# Altium PCB PCB_ZCD-and-AC-Voltage-sensor_2025-10-18.pcbdoc
Units mm, origin at the board's own origin, x right, y up, seen from the top; angles counter-clockwise.
Board outline 125.65 x 110.9 mm, 2 copper layers (Top Layer, Bottom Layer); 88 components, 45 nets, 199 pads, 188 vias.
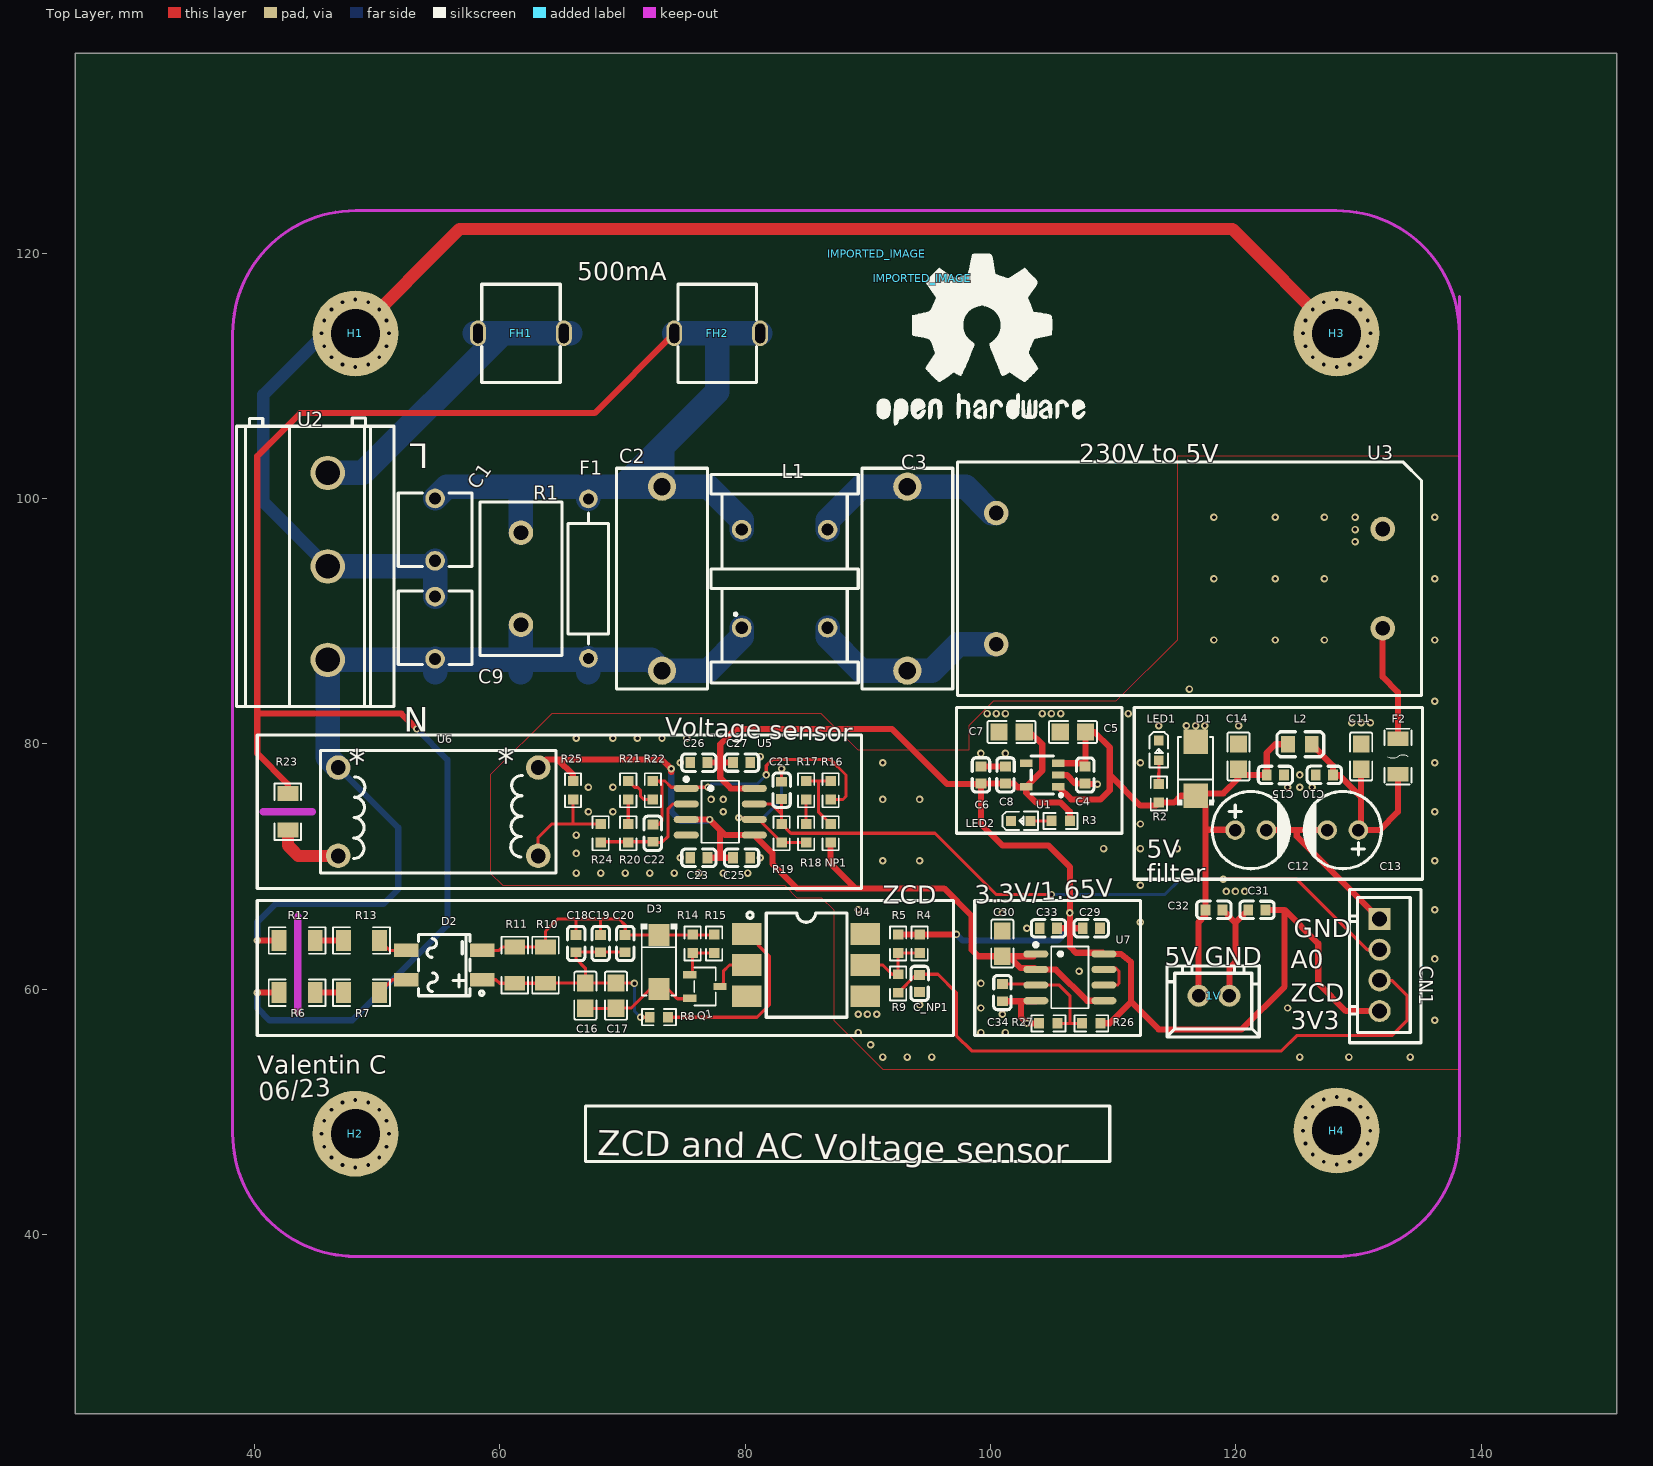
[diagram p0: Top Layer view]
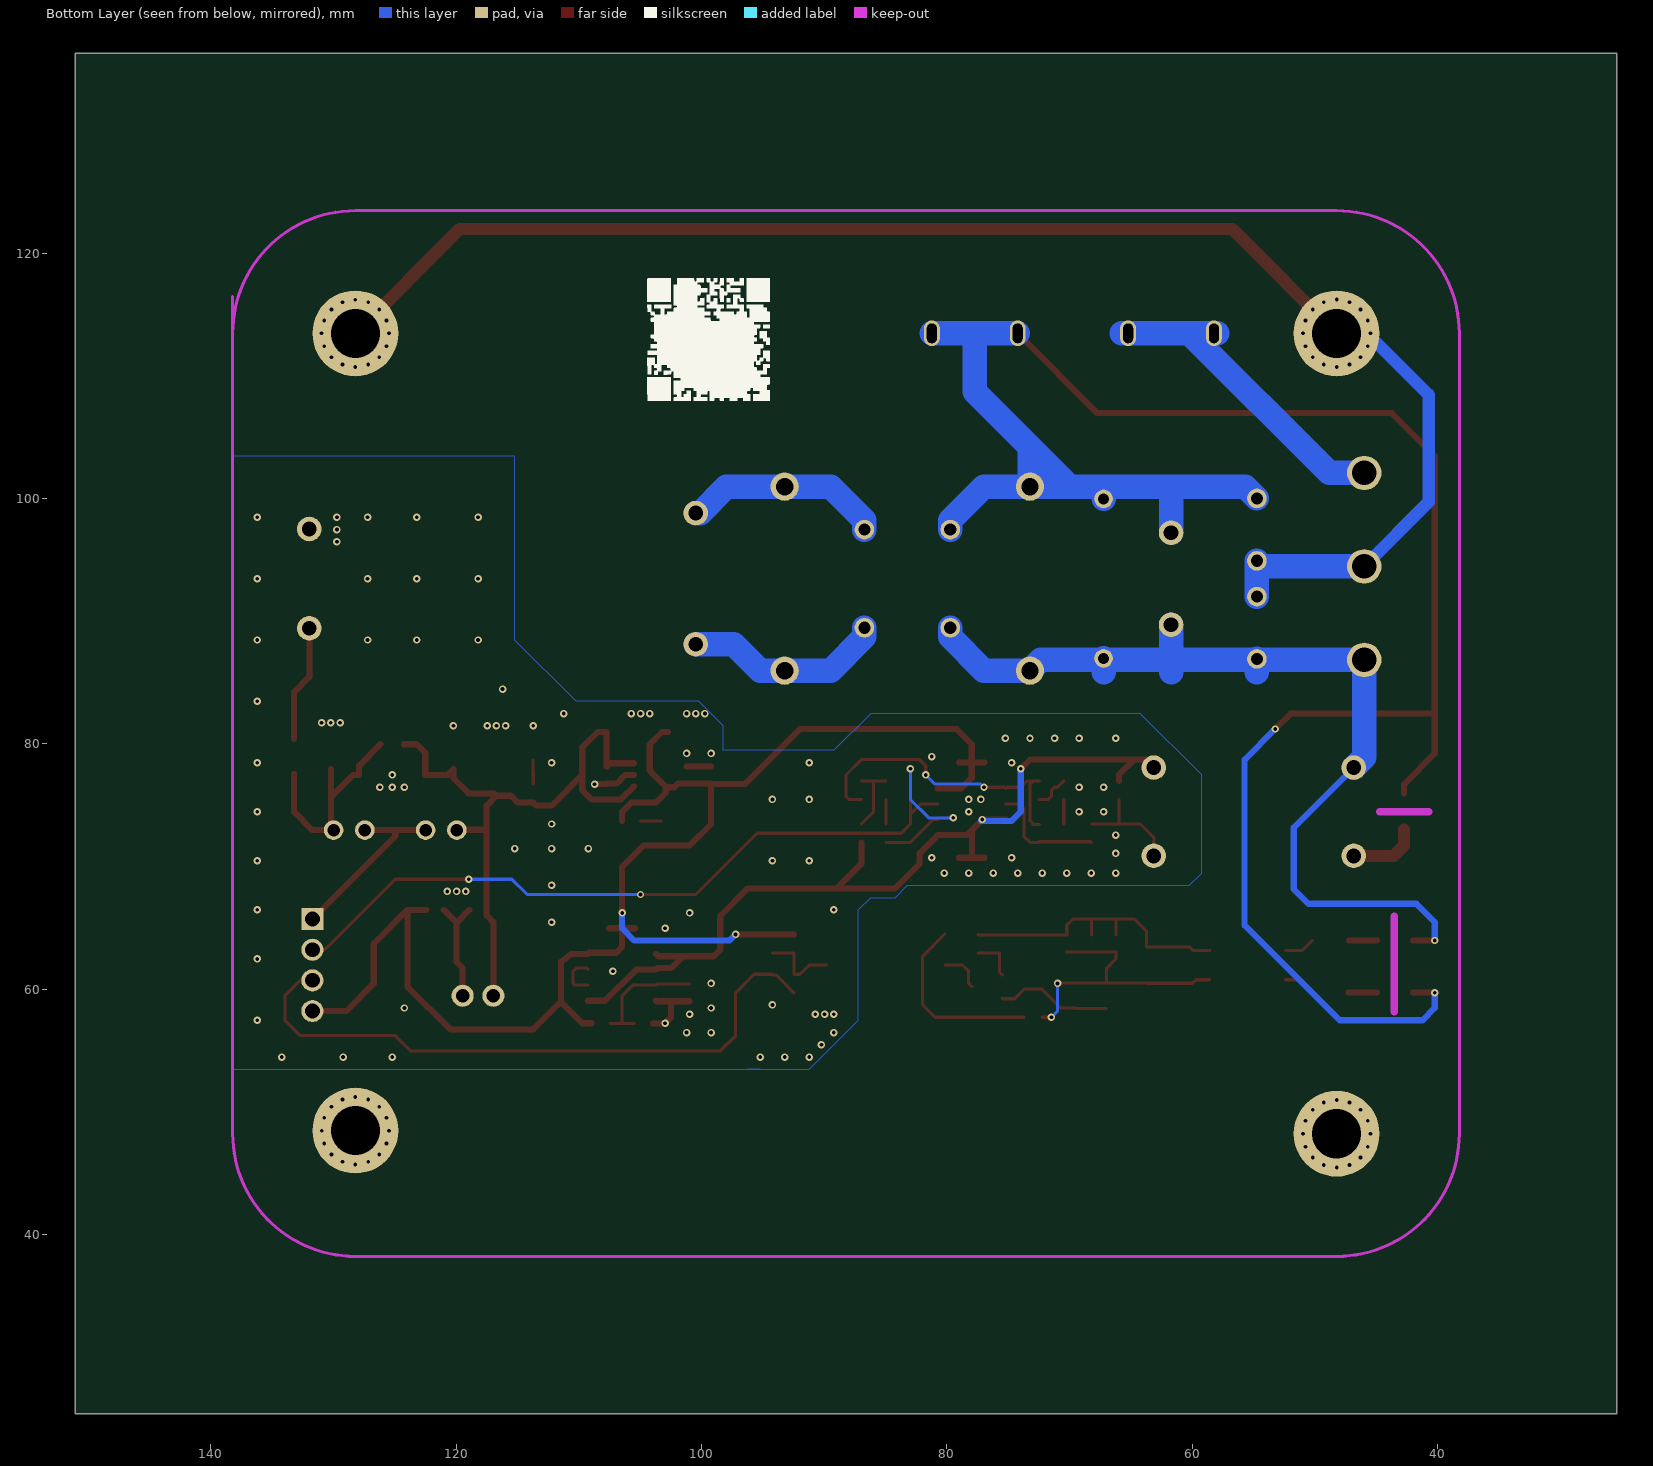
[diagram p1: Bottom Layer view, seen from below]

## Layer stack, top to bottom
Top Layer: signal copper (thickness not stored)
Dielectric: dielectric 0.32, FR-4, Dk 4.8
Bottom Layer: signal copper (thickness not stored)

## Board outline
151.054,25.4 25.4,25.4 25.4,136.304 151.054,136.304

## Components (designator, comment, footprint, x,y, rotation, side; value= is the part's Value field where it differs from the comment)
1V "XH-2A_C2908600" CONN-TH_2P-P2.50_HCTL_XH-2A-X 118.227,59.477 r180 top
C1 "1nF" CAP-TH_L6.0-W6.0-P5.08-D1.0 54.727,97.477 r90 top
C2 "100nF" 18*7.5*13.5/P=15 73.227,93.477 r90 top
C3 "100nF" 18*7.5*13.5/P=15 93.227,93.477 r90 top
C4 "100nF" C0603 107.727,77.477 r90 top
C5 "10uF" C0805 106.727,80.977 r0 top
C6 "100nF" C0603 99.227,77.477 r270 top
C7 "10uF" C0805 101.727,80.977 r0 top
C8 "100nF" C0603 101.227,77.477 r270 top
C9 "1nF" CAP-TH_L6.0-W6.0-P5.08-D1.0 54.727,89.477 r90 top
C10 "100nF" C0603 127.227,77.477 r0 top
C11 "10uF" C0805 130.227,78.977 r270 top
C12 "220uF" CAP-TH_BD6.3-P2.50-D1.0-FD 128.727,72.977 r180 top
C13 "220uF" CAP-TH_BD6.3-P2.50-D1.0-FD 121.227,72.977 r0 top
C14 "10uF" C0805 120.227,78.977 r270 top
C15 "100nF" C0603 123.227,77.477 r180 top
C16 "10uF" C0805 66.977,59.477 r90 top
C17 "10uF" C0805 69.477,59.477 r90 top
C18 "1nF" C0603 66.227,63.727 r270 top
C19 "1nF" C0603 68.227,63.727 r270 top
C20 "1nF" C0603 70.227,63.727 r270 top
C21 "1nF" C0603 82.977,76.227 r270 top
C22 "1nF" C0603 72.477,72.727 r90 top
C23 "100nF" C0603 76.227,70.727 r180 top
C25 "100nF" C0603 79.727,70.727 r0 top
C26 "100nF" C0603 76.227,78.477 r180 top
C27 "100nF" C0603 79.727,78.477 r0 top
C29 "100nF" C0603 108.227,64.977 r0 top
C30 "10uF" C0805 100.977,63.727 r270 top
C31 "100nF" C0603 121.727,66.477 r180 top
C32 "100nF" C0603 118.227,66.477 r0 top
C33 "100nF" C0603 104.727,64.977 r180 top
C34 "100nF" C0603 100.977,59.727 r270 top
C_NP1 "100nF" C0603 94.227,60.477 r270 top
CN1 "XH-4A" CONN-TH_4P-P2.50_XH-4A 131.727,61.977 r270 top
D1 "SMAJ5.0" SMA_L4.3-W2.6-LS5.2-RD 116.727,77.977 r90 top
D2 "MB6S_C211754" MBS_L4.7-W3.8-P2.40-LS7.0-TL 55.477,61.977 r180 top
D3 "SS14" SMA_L4.4-W2.6-LS5.0-RD 72.977,62.227 r270 top
F1 "1M" RES-TH_BD3.3-L9.0-P13.00-D0.6 67.227,93.477 r90 top
F2 "BSMD1206-150-16V" F1206 133.227,78.977 r270 top
FH1 "LS-601" FUSE-TH_LS-601 61.727,113.477 r0 top
FH2 "LS-601" FUSE-TH_LS-601 77.727,113.477 r0 top
H1 "HoleHole" HOLEHOLE 48.227,113.477 r0 top
H2 "HoleHole" HOLEHOLE 48.227,48.227 r0 top
H3 "HoleHole" HOLEHOLE 128.227,113.476 r0 top
H4 "HoleHole" HOLEHOLE 128.227,48.477 r0 top
IMPORTED_IMAGE "IMPORTED_IMAGE" IMPORTED_IMAGE 94.424,117.98 r0 top
IMPORTED_IMAGE "IMPORTED_IMAGE" IMPORTED_IMAGE 90.727,119.977 r0 top
L1 "PDUUAT98-103MLN" FILTER-TH_4P-L17.0-W12.0-P7.00-D0.6-S8.00-1 83.227,93.477 r0 top
L2 "600Ω" L0805 125.227,79.977 r180 top
LED1 "19-213SURC/S530-A3/TR8" LED0603-RD 113.727,79.477 r270 top
LED2 "19-213SURC/S530-A3/TR8" LED0603-RD 102.477,73.727 r0 top
NP1 "0" R0603 86.977,72.727 r270 top
Q1 "MMBT2222A,215" SOT-23-3_L2.9-W1.6-P1.90-LS2.8-BR 76.727,60.227 r180 top
R1 "10D471K" RES-TH_L12.5-W6.7-P7.50-D1.2 61.727,93.477 r90 top
R2 "1kΩ" R0603 113.727,75.977 r270 top
R3 "1kΩ" R0603 105.727,73.727 r0 top
R4 "10K" R0603 94.227,63.727 r90 top
R5 "10K" R0603 92.477,63.727 r90 top
R6 "150kΩ" R1206 43.477,59.727 r0 top
R7 "150kΩ" R1206 48.727,59.727 r0 top
R8 "100Ω" R0603 72.977,57.727 r0 top
R9 "0" R0603 92.477,60.477 r270 top
R10 "150kΩ" R1206 63.727,61.977 r270 top
R11 "150kΩ" R1206 61.227,61.977 r270 top
R12 "150kΩ" R1206 43.477,63.977 r0 top
R13 "150kΩ" R1206 48.727,63.977 r0 top
R14 "100Ω" R0603 75.727,63.727 r270 top
R15 "100Ω" R0603 77.477,63.727 r90 top
R16 "0" R0603 86.977,76.227 r90 top
R17 "0" R0603 84.977,76.227 r270 top
R18 "10K" R0603 84.977,72.727 r270 top
R19 "100kΩ" R0603 82.977,72.727 r270 top
R20 "10K" R0603 70.477,72.727 r90 top
R21 "10K" R0603 70.477,76.227 r90 top
R22 "10K" R0603 72.477,76.227 r90 top
R23 "820kΩ" R1206 42.727,74.477 r270 top
R24 "10K" R0603 68.227,72.727 r270 top
R25 "100Ω" R0603 65.977,76.227 r90 top
R26 "10K" R0603 108.227,57.227 r0 top
R27 "10K" R0603 104.727,57.227 r0 top
U1 "XC6210B332MR" SOT-23-5_L3.0-W1.7-P0.95-LS2.8-BR 104.227,77.477 r0 top
U2 "AC" CONN-TH_3P-P7.62_KF7620-7.62-3P 45.977,94.477 r270 top
U3 "TAS5-5-WEDT" PWRM-TH_TAS5-X-WEDT 116.227,93.477 r0 top
U4 "4N35S-TA1" OPTO-SMD-6_L8.5-W6.5-P2.54-LS9.2-BL 84.977,61.977 r270 top
U5 "MCP6002T-I/SN" SOIC-8_L4.9-W3.9-P1.27-LS6.0-BL 77.977,74.477 r270 top
U6 "ZMPT107-1" XFMR-TH_ZMPT107-1 54.977,74.477 r0 top
U7 "MCP6002T-I/SN" SOIC-8_L4.9-W3.9-P1.27-LS6.0-BL 106.477,60.977 r270 top

## Footprints (in the part's own frame and the unit in brackets; to place one, negate y for a bottom-side part, rotate by r counter-clockwise, add the part's x,y. Pads: shape width x height; smd on the part's side, far side on the other; paste and mask are expansions set on the pad)
18*7.5*13.5/P=15 [mm]
  round 2.3 hole 1.4 paste+0 mask+0.051: 1(-7.501,0) 2(7.501,0)
  silkscreen extent -9,-3.7 9,3.7
C0603 [mm]
  rect 0.8x0.9 smd paste+0 mask+0.051: 1(-0.7,0) 2(0.7,0)
  silkscreen extent -1.41,-0.71 1.39,0.72
C0805 [mm]
  rect 1.41x1.35 smd paste-100 mask+0.051: 1(-1.03,0) 2(1.03,0)
  silkscreen extent -1.96,-0.9 1.96,0.9
CAP-TH_BD6.3-P2.50-D1.0-FD [mm]
  round 1.6 hole 1 paste+0 mask+0.051: 1(-1.27,0) 2(1.27,0)
  silkscreen extent -3.15,-3.15 3.17,3.15
CAP-TH_L6.0-W6.0-P5.08-D1.0 [mm]
  round 1.6 hole 1 paste+0 mask+0.051: 1(-2.54,0) 2(2.54,0)
  silkscreen extent -3,-3 3,3
CONN-TH_2P-P2.50_HCTL_XH-2A-X [mm]
  round 1.8 hole 1.1 paste+0 mask+0.051: 1(-1.251,0) 2(1.251,0)
  silkscreen extent -3.69,-2.45 3.83,3.35
CONN-TH_3P-P7.62_KF7620-7.62-3P [mm]
  round 2.8 hole 2 paste+0 mask+0.051: 1(-7.62,0) 2(0,0) 3(7.62,0)
  silkscreen extent -12.1,-7.45 11.43,5.4
CONN-TH_4P-P2.50_XH-4A [mm]
  rect 1.8x1.8 hole 1.199 paste+0 mask+0.051: 1(-3.75,0)
  round 1.8 hole 1.199 paste+0 mask+0.051: 2(-1.25,0) 3(1.25,0) 4(3.75,0)
  silkscreen extent -6.17,-2.44 6.33,3.38
F1206 [mm]
  rect 1.19x1.728 smd paste+0 mask+0.051: 1(-1.445,0) 2(1.445,0)
  silkscreen extent -2.27,-1.09 2.27,1.09
FILTER-TH_4P-L17.0-W12.0-P7.00-D0.6-S8.00-1 [mm]
  round 1.6 hole 1 paste+0 mask+0.051: 1(-3.5,-4.001) 2(-3.5,4) 3(3.5,4) 4(3.5,-4.001)
  silkscreen extent -6,-8.5 6,8.5
FUSE-TH_LS-601 [mm]
  oval 1.3x2.1 hole 0.8 slot 1.6 at 90 deg paste+0 mask+0.05: 1(-3.5,0) 2(3.5,0)
  silkscreen extent -3.2,-4 3.2,4
HOLEHOLE [mm]
  round 7 hole 4 paste+0 mask+0.051: 1(0,0)
IMPORTED_IMAGE [mm]
L0805 [mm]
  rect 1.133x1.377 smd paste-100 mask+0.051: 1(-0.966,0) 2(0.966,0)
  silkscreen extent -1.95,-1.02 1.86,1.02
LED0603-RD [mm]
  rect 0.8x0.8 smd paste+0 mask+0.051: 1(-0.799,-0.003) 2(0.799,0.004)
  silkscreen extent -1.49,-0.75 1.39,0.76
MBS_L4.7-W3.8-P2.40-LS7.0-TL [mm]
  rect 2x1.1 smd paste+0 mask+0.051: 1(-3.1,1.2) 2(-3.1,-1.2) 3(3.1,-1.2) 4(3.1,1.2)
  silkscreen extent -3.23,-2.5 2.1,2.5
OPTO-SMD-6_L8.5-W6.5-P2.54-LS9.2-BL [mm]
  rect 1.78x2.4 smd paste+0 mask+0.051: 1(-2.54,-4.826) 2(0,-4.826) 3(2.54,-4.826) 4(2.54,4.826) 5(0,4.826) 6(-2.54,4.826)
  silkscreen extent -4.32,-4.83 4.25,3.32
PWRM-TH_TAS5-X-WEDT [mm]
  round 2 hole 1.2 paste+0 mask+0.051: 1(-15.75,5.35) 2(-15.75,-5.35) 3(15.75,4.05) 4(15.75,-4.05)
  silkscreen extent -18.92,-9.53 18.92,9.53
R0603 [mm]
  rect 0.806x0.864 smd paste-100 mask+0.051: 1(-0.753,0) 2(0.753,0)
  silkscreen extent -1.39,-0.66 1.39,0.66
R1206 [mm]
  rect 1.208x1.701 smd paste-100 mask+0.051: 1(-1.479,0) 2(1.479,0)
  silkscreen extent -2.31,-1.08 2.31,1.08
RES-TH_BD3.3-L9.0-P13.00-D0.6 [mil]
  round 60 hole 36 paste+0 mask+2: 1(-255.91,0) 2(255.9,0)
  silkscreen extent -210,-65 210,65
RES-TH_L12.5-W6.7-P7.50-D1.2 [mm]
  round 2 hole 1.2 paste+0 mask+0.051: 1(-3.749,0) 2(3.749,0)
  silkscreen extent -6.25,-3.35 6.25,3.35
SMA_L4.3-W2.6-LS5.2-RD [mm]
  rect 2x2 smd paste+0 mask+0.051: 1(-2.2,0) 2(2.2,0)
  silkscreen extent -2.98,-1.5 2.6,1.5
SMA_L4.4-W2.6-LS5.0-RD [mm]
  rect 1.8x1.7 smd paste+0 mask+0.051: 1(-2.192,0) 2(2.192,0)
  silkscreen extent -3.11,-1.48 2.73,1.48
SOIC-8_L4.9-W3.9-P1.27-LS6.0-BL [mm]
  oval 0.588x2.045 smd paste+0 mask+0.051: 1(-1.905,-2.773) 2(-0.635,-2.773) 3(0.635,-2.773) 4(1.905,-2.773) 5(1.905,2.773) 6(0.635,2.773) 7(-0.635,2.773) 8(-1.905,2.773)
  silkscreen extent -2.8,-2.92 2.53,1.52
SOT-23-3_L2.9-W1.6-P1.90-LS2.8-BR [mm]
  rect 1.07x0.6 smd paste+0 mask+0.051: 1(1.235,-0.95) 2(1.235,0.95) 3(-1.235,0)
  silkscreen extent -0.88,-1.54 0.88,1.54
SOT-23-5_L3.0-W1.7-P0.95-LS2.8-BR [mm]
  rect 1x0.6 smd paste+0 mask+0.051: 1(1.3,-0.95) 2(1.3,0) 3(1.3,0.95) 4(-1.3,0.95) 5(-1.3,-0.95)
  silkscreen extent -0.9,-1.78 1.65,1.55
XFMR-TH_ZMPT107-1 [mm]
  round 2 hole 1.2 paste+0 mask+0.051: 1(-8.15,3.6) 2(-8.15,-3.6) 3(8.15,3.6) 4(8.15,-3.6)
  silkscreen extent -9.6,-5 9.6,5

## Via types
v1: diameter 0.61, hole 0.305, Top Layer to Bottom Layer, tented both sides, 179 vias
v2: diameter 0.6, hole 0.305, Top Layer to Bottom Layer, tented both sides, 9 vias

## Nets (pads, with @x,y where several pads share a name; then routed paths per layer and width w, separated by ;. In a path a pad name is that pad's centre, name@x,y a point inside that pad or via, vN(x,y) a via of type N, cw(c..) or ccw(c..) an arc to the next point about the centre after c; other vN are vias at no path point)
3V3: C6.2 C7.2 C8.2 C26.1 C27.1 C29.1 C31.1 C33.1 CN1.4 R3.2 R4.2 R5.2 R26.2 U1.5 U5.8 U7.8 | length 130.9
  Top Layer w0.5: C26.1 C27.1 ; U5.8 78.822,76.382 77.978,77.228 77.978,79.979 79.228,81.226 91.976,81.226 96.477,76.728 99.177,76.728 C6.2 99.228,73.476 100.978,71.726 104.727,71.726 106.477,69.976 106.487,64.978 ; R5.2 R4.2 94.23,64.477 v2(97.227,64.477) ; C6.2 C8.2 101.927,76.777 102.227,76.477 102.877,76.477 U1.5 104.227,77.827 104.227,79.977 103.227,80.977 C7.2 ; U1.5 102.926,76.027 103.726,75.226 105.728,75.226 106.477,74.477 R3.2@106.48,73.728 ; C33.1 C29.1 ; 106.488,64.977 106.488,63.466 106.977,62.977 109.154,62.977 U7.8 ; R26.2@108.981,57.228 109.726,57.228 111.476,58.978 ; U7.8@109.248,62.882 110.632,62.882 111.476,62.227 111.476,58.978 ; C31.1 123.977,66.477 ; CN1.4 128.977,58.227 126.727,60.477 126.727,63.727 123.977,66.477 ; 111.476,58.978 113.727,56.727 120.477,56.727 123.977,60.227 123.977,66.477
  Bottom Layer w0.5: v2(97.227,64.477) 97.727,63.977 103.727,63.977 105.477,63.977 106.477,64.977 v2(106.477,66.227)
5V: 1V.2 C4.2 C5.2 C13.1 C14.2 C15.2 C32.1 D1.1 L2.2 R2.2 U1.1 U1.3 | length 55.6
  Top Layer w0.5: U1.1 106.577,75.477 108.977,75.477 109.727,76.227 109.727,79.727 108.477,80.977 C5.2 107.757,78.207 C4.2 107.477,78.427 U1.3 ; 109.727,78.217 109.727,77.477 112.227,74.977 113.48,74.977 R2.2 ; R2.2 114.976,75.226 115.527,75.778 D1.1@116.726,75.778 ; 1V.2@116.975,59.476 116.977,65.478 117.526,66.027 C32.1 ; C32.1 117.527,74.977 D1.1 116.927,75.977 118.977,75.977 120.227,77.227 C14.2 120.697,77.477 C15.2 122.527,79.277 123.227,79.977 L2.2 ; 117.527,73.007 119.927,73.007 C13.1
230V_LF: C3.2 L1.3 U3.1 | length 16.5
  Bottom Layer w2: L1.3@86.726,97.477 86.726,98.226 89.477,100.977 93.226,100.977 97.976,100.977 100.127,98.826 U3.1
230V_NF: C3.1 L1.4 U3.2 | length 16.5
  Bottom Layer w2: L1.4@86.726,89.476 86.726,88.727 89.477,85.976 93.226,85.976 95.227,85.976 97.376,88.127 U3.2
AC_IN_ZMPT: R23.2 U6.2 | length 5.7
  Top Layer w1: R23.2 42.727,71.727 43.104,71.35 43.577,70.877 U6.2
C12_1: C10.2 C11.2 C12.1 F2.2 L2.1 | length 18.2
  Top Layer w0.5: L2.1 127.927,78.243 C10.2 128.405,77.477 130.227,75.655 ; C11.2 130.227,73.207 C12.1 131.727,72.977 133.227,74.477 F2.2
C16_1: C16.1 C17.1 D3.2 Q1.2 | length 9.5
  Top Layer w0.254: C16.1 C17.1 69.507,58.477 70.727,58.477 72.284,60.034 D3.2 73.669,60.034 74.477,59.227 75.442,59.227 Q1.2
C21_1: C21.1 R18.2 R19.2 U5.6 | length 14
  Top Layer w0.254: v1(79.477,73.977) 80.614,73.977 U5.6 81.113,73.842 R19.2 ; R19.2 R18.2 ; C21.1 v1(82.977,77.977)
  Bottom Layer w0.254: v1(79.477,73.977) 81.477,73.977 82.977,75.477 v1(82.977,77.977)
C34_1: C34.1 R26.1 R27.2 U7.3 | length 10.1
  Top Layer w0.254: C34.1 103.619,60.427 U7.3@103.704,60.342 ; U7.3 105.611,60.342 106.477,59.476 106.477,57.256 106.505,57.228 ; R27.2 R26.1
D2_1: C16.2 C17.2 C18.2 C19.2 C20.2 D2.1 R8.1 R10.2 R11.2 | length 23.1
  Top Layer w0.254: D2.1 59.678,60.776 59.998,60.497 R10.2 C16.2 ; C20.2 C18.2 66.227,62.477 66.977,61.727 C16.2 ; v1(70.977,60.477) 70.947,60.507 C17.2 C16.2 ; v1@71.477,57.727 R8.1@72.224,57.727
  Bottom Layer w0.254: v1(70.977,60.477) 70.977,58.227 v1@71.477,57.727
  other v1: 71.477,57.727
D2_2: C18.1 C19.1 C20.1 D2.2 D3.1 R10.1 R11.1 R14.1 R15.2 | length 24.3
  Top Layer w0.254: D2.2 59.948,63.177 60.227,63.456 R10.1 63.727,64.727 64.727,65.727 69.727,65.727 70.227,65.227 C20.1 ; C18.1 66.227,65.727 ; C19.1 68.227,65.727 ; C20.1 D3.1 ; D3.1 77.416,64.419 R15.2
D2_3: D2.3 R13.2 | length 2.5
  Top Layer w0.254: R13.2 51.006,63.177 D2.3
D2_4: D2.4 R7.2 | length 2.6
  Top Layer w0.254: R7.2 51.256,60.777 D2.4
EARTH: C1.1 C9.2 H1.1 H3.1 U2.2 | length 124.9
  Top Layer w1: H1.1 56.726,121.978 119.726,121.978 H3.1
  Bottom Layer w1: U2.2 40.727,99.727 40.727,108.477 45.727,113.477 H1.1
  Bottom Layer w2: U2.2 54.727,94.477 C1.1 C9.2
  other v1: 48.227,110.727 128.227,110.726 47.175,110.936 49.279,110.936 127.175,110.936 129.279,110.936 46.282,111.532 50.172,111.532 126.282,111.532 130.172,111.532 45.686,112.425 50.768,112.425 125.686,112.424 130.768,112.424 45.477,113.477 50.977,113.477 125.477,113.476 130.977,113.476 45.686,114.529 50.768,114.529 125.686,114.529 130.768,114.529 46.282,115.421 50.172,115.421 126.282,115.421 130.172,115.421 47.175,116.018 49.279,116.018 127.175,116.017 129.279,116.017 48.227,116.227 128.227,116.226
GND: 1V.1 C4.1 C5.1 C6.1 C7.1 C8.1 C10.1 C11.1 C12.2 C13.2 C14.1 C15.1 C23.2 C25.2 C26.2 C27.2 C29.2 C30.1 C31.2 C32.2 C33.2 C34.2 C_NP1.2 CN1.1 D1.2 LED1.1 LED2.1 R27.1 U1.2 U3.3 U4.4 U5.4 U7.4 | length 36.1
  Top Layer w0.5: C6.1 C8.1 ; C34.2 103.659,59.027 U7.4@103.704,59.072 ; 102.506,59.027 102.506,57.698 v1(102.977,57.227) R27.1 ; U1.2 106.227,77.477 106.927,76.777 C4.1 107.777,76.727 v1(108.727,76.727) ; C32.2 119.977,65.427 ; 1V.1 119.478,61.728 119.977,62.227 119.977,65.427 ; 119.977,64.681 119.977,65.427 ; C31.2 119.977,65.427 ; C13.2 124.977,72.977 ; C12.2 124.977,72.977 ; CN1.1 124.977,72.477 124.977,72.977
  other v1: 91.227,54.477 93.227,54.477 95.227,54.477 125.227,54.477 129.227,54.477 134.227,54.477 90.227,55.477 89.227,56.477 99.227,56.477 101.227,56.477 136.227,57.477 89.227,57.977 89.977,57.977 90.727,57.977 100.977,57.977 99.227,58.477 124.227,58.477 94.227,58.727 99.227,60.477 107.227,61.477 136.227,62.477 102.977,64.977 112.227,65.477 100.977,66.227 89.227,66.477 136.227,66.477 119.227,67.977 119.977,67.977 120.727,67.977 112.227,68.477 66.227,69.477 68.227,69.477 70.227,69.477 72.227,69.477 74.227,69.477 76.227,69.477 78.227,69.477 80.227,69.477 91.227,70.477 94.227,70.477 136.227,70.477 74.727,70.727 81.227,70.727 66.227,71.077 109.227,71.477 112.227,71.477 115.227,71.477 66.227,72.577 112.227,73.477 67.227,74.477 69.227,74.477 78.227,74.477 136.227,74.477 77.227,75.477 78.227,75.477 91.227,75.477 94.227,75.477 67.227,76.477 69.227,76.477 124.227,76.477 125.227,76.477 126.227,76.477 125.227,77.477 74.727,78.477 91.227,78.477 112.227,78.477 136.227,78.477 81.227,78.977 99.227,79.227 101.227,79.227 66.227,80.477 69.227,80.477 71.227,80.477 73.227,80.477 75.227,80.477 113.727,81.477 115.977,81.477 116.727,81.477 117.477,81.477 120.227,81.477 129.477,81.727 130.227,81.727 130.977,81.727 99.727,82.477 100.477,82.477 101.227,82.477 104.227,82.477 104.977,82.477 105.727,82.477 111.227,82.477 136.227,83.477 116.227,84.477 118.227,88.477 123.227,88.477 127.227,88.477 136.227,88.477 118.227,93.477 123.227,93.477 127.227,93.477 136.227,93.477 129.727,96.477 129.727,97.477 118.227,98.477 123.227,98.477 127.227,98.477 129.727,98.477 136.227,98.477
L: C1.2 C2.2 F1.2 FH2.1 FH2.2 L1.2 R1.2 R6.1 R23.1 | length 181.8
  Top Layer w0.5: 40.226,82.402 40.226,82.476 51.976,82.476 v2@53.226,81.226 ; v2(40.227,59.727) R6.1 ; R23.1 42.731,76.715 40.226,79.237 40.226,103.476 43.726,106.976 67.727,106.976 FH2.1
  Bottom Layer w0.5: v2(40.227,59.727) 40.226,58.478 41.227,57.477 47.976,57.477 55.728,65.227 55.728,78.727 v2@53.226,81.226
  Bottom Layer w2: C1.2 55.688,100.978 C2.2 73.227,104.17 ; R1.2 61.727,100.978 ; 65.605,100.978 69.978,100.978 77.727,108.727 77.727,113.477 ; F1.2 67.227,100.978 ; C2.2@73.226,100.977 76.977,100.977 79.726,98.226 L1.2@79.726,97.477 ; FH2.1 FH2.2
  other v2: 53.227,81.227
LED1_2: LED1.2 R2.1 | length 1.9
  Top Layer w0.254: R2.1 LED1.2@113.731,78.678
LED2_2: LED2.2 R3.1 | length 1.7
  Top Layer w0.254: LED2.2 R3.1@104.973,73.728
N: C2.1 C9.1 F1.1 L1.1 R1.1 R12.1 U2.3 U6.1 | length 79
  Top Layer w0.5: v2(40.227,63.977) R12.1
  Bottom Layer w0.5: v2(40.227,63.977) 40.226,65.475 41.727,66.977 50.528,66.977 51.727,68.175 51.727,73.177 U6.1
  Bottom Layer w2: U6.1 45.977,78.927 U2.3 72.346,86.857 C2.1 ; 54.727,85.857 C9.1 ; 61.727,85.857 R1.1 ; 67.227,85.857 F1.1 ; C2.1@73.226,85.976 76.977,85.976 79.726,88.727 L1.1@79.726,89.476
Q1_1: Q1.1 R14.2 R15.1 | length 3.6
  Top Layer w0.254: Q1.1 75.727,61.412 R14.2 R15.1
R6_2: R6.2 R7.1 | length 2.3
  Top Layer w0.5: R6.2 R7.1
R9_1: R4.1 R5.1 R9.1 U4.5 | length 6.5
  Top Layer w0.254: U4.5 91.227,61.977 91.974,61.23 R9.1 R5.1 R4.1
R12_2: R12.2 R13.1 | length 2.3
  Top Layer w0.5: R12.2@44.935,63.977 R13.1@47.227,63.977
R17_1: NP1.1 R16.2 R17.1 | length 5.9
  Top Layer w0.254: R17.1 R16.2 ; 86.053,76.979 85.977,76.905 85.977,74.477 NP1.1@86.977,73.482
R17_2: R17.2 R18.1 | length 2
  Top Layer w0.254: R18.1 R17.2
R20_1: C22.1 R20.1 R24.2 U5.2 | length 9.6
  Top Layer w0.254: R24.2 68.28,72.027 C22.1 72.527,71.977 73.227,71.977 73.727,72.477 73.727,74.727 74.112,75.112 U5.2
R20_2: R20.2 R21.1 | length 2
  Top Layer w0.254: R20.2 R21.1
R21_2: R21.2 R22.1 | length 2.9
  Top Layer w0.254: R21.2 70.98,76.477 71.227,76.477 71.477,76.227 71.477,75.727 71.73,75.474 R22.1
R22_2: C22.2 R16.1 R22.2 U5.1 | length 25.8
  Top Layer w0.254: C22.2@72.477,73.428 72.926,73.428 73.226,73.728 73.226,76.728 72.974,76.979 R22.2 ; R22.2 73.474,76.98 73.977,76.477 75.11,76.477 U5.1 75.3,76.477 v1(76.977,76.477) ; v1(81.727,77.477) 81.727,78.227 82.227,78.727 83.227,78.727 86.977,78.727 88.227,77.477 88.227,75.727 87.977,75.477 86.98,75.477 R16.1
  Bottom Layer w0.254: v1(76.977,76.477) 77.227,76.727 80.977,76.727 v1(81.727,77.477)
S$10247: 
S$11319: 
S$11323: 
S$12200: 
S$12225: 
S$12289: 
S$31628: 
U2_1: FH1.1 FH1.2 U2.1 | length 31.7
  Bottom Layer w2: U2.1 48.847,102.097 60.226,113.476 FH1.2 ; FH1.1@57.977,113.477 FH1.2@65.727,113.477
U3_4: F2.1 U3.4 | length 9.5
  Top Layer w0.5: U3.4 131.977,85.477 133.227,84.227 F2.1
U4_1: R8.2 U4.1 | length 15.2
  Top Layer w0.254: R8.2 80.977,57.727 81.977,58.727 81.977,62.691 U4.1
U4_2: Q1.3 U4.2 | length 3.5
  Top Layer w0.254: Q1.3 78.227,60.492 78.227,61.477 78.727,61.977 U4.2
U6_4: R24.1 R25.1 U6.4 | length 9.1
  Top Layer w0.254: U6.4@63.127,70.878 63.127,72.377 64.227,73.482 R24.1@68.227,73.482 ; 65.977,73.482 R25.1
U7_6: U7.6 U7.7 | length 3.7
  Top Layer w0.254: U7.6@109.248,60.342 110.343,60.342 110.478,60.477 110.478,61.477 110.226,61.726 109.365,61.726 U7.7@109.248,61.612
VDD/2: C23.1 C25.1 C30.2 NP1.2 R25.2 U5.3 U5.5 U6.3 U7.1 U7.2 U7.5 | length 76.4
  Top Layer w0.5: U6.3 63.777,78.727 67.477,78.727 73.227,78.727 v2(73.977,77.977) v2@73.977,77.727 ; 64.333,78.727 64.727,78.727 65.977,77.477 R25.2 ; U5.3 v2(77.112,73.842) 77.968,72.984 ; C23.1 C25.1 ; 77.968,70.728 77.968,72.984 ; NP1.2 86.977,70.227 88.977,68.227 96.227,68.227 98.477,65.977 98.477,63.227 99.007,62.697 C30.2 ; 89.997,68.227 84.227,68.227 82.227,70.227 82.227,71.094 U5.5 78.38,72.572 77.968,72.984 ; U7.1@103.704,62.882 103.519,62.697 C30.2 ; U7.5 107.882,59.072 105.342,61.612 103.704,61.612 103.589,61.727 102.477,61.727 101.507,62.697 C30.2
  Bottom Layer w0.5: v2(73.977,77.977) 73.978,74.477 74.727,73.728 v2@77.226,73.728
VOLTAGESENSOR: C21.2 CN1.2 R19.1 U5.7 | length 58.7
  Top Layer w0.254: U5.7 82.126,75.112 82.977,74.261 ; C21.2 R19.1 83.73,72.727 85.977,72.727 95.477,72.727 100.227,67.977 100.477,67.727 v2@104.977,67.727 ; v2(118.977,68.977) 124.977,68.977 130.727,63.227 CN1.2@131.727,63.227
  Bottom Layer w0.254: v2@104.977,67.727 114.227,67.727 115.477,68.977 v2(118.977,68.977)
  other v2: 104.977,67.727
ZCD: C_NP1.1 CN1.3 R9.2 | length 52.6
  Top Layer w0.254: R9.2 93.93,61.177 C_NP1.1 94.277,61.227 95.727,61.227 97.227,59.727 97.227,56.227 98.477,54.977 123.727,54.977 124.977,56.227 132.727,56.227 133.977,57.477 133.977,59.477 132.727,60.727 CN1.3
pads on no net: H2.1 H4.1 U1.4 U4.3 U4.6
copper on no net:
  other v1: 48.227,45.477 47.175,45.686 49.279,45.686 128.227,45.727 127.174,45.936 129.279,45.936 46.282,46.282 50.172,46.282 126.282,46.532 130.171,46.532 45.686,47.175 50.768,47.175 125.686,47.425 130.768,47.425 45.477,48.227 50.977,48.227 125.477,48.477 130.977,48.477 45.686,49.279 50.768,49.279 125.686,49.529 130.768,49.529 46.282,50.172 50.172,50.172 126.282,50.422 130.171,50.422 47.175,50.768 49.279,50.768 48.227,50.977 127.174,51.018 129.279,51.018 128.227,51.227

## Polygon pours and split planes (outlines as drawn)
GND on Bottom Layer (solid): 59.227,77.477 64.227,82.477 86.227,82.477 89.227,79.477 98.227,79.477 98.227,81.477 100.227,83.477 110.227,83.477 115.227,88.477 115.227,96.477 115.227,103.477 128.227,103.477 138.227,103.477 138.227,88.477 138.227,53.477 138.227,54.477 138.227,53.477 95.227,53.477 96.227,53.477 91.227,53.477 87.227,57.477 87.227,66.477 86.227,67.477 84.227,67.477 83.227,68.477 82.227,68.477 77.227,68.477 60.227,68.477 59.227,69.477 59.227,73.477 59.227,77.477 61.227,79.477 59.227,77.477
GND on Top Layer (solid): 138.227,103.477 115.227,103.477 115.227,88.477 110.227,83.477 100.227,83.477 98.227,81.477 98.227,79.477 89.227,79.477 86.227,82.477 84.227,82.477 64.227,82.477 59.227,77.477 59.227,75.477 59.227,69.477 60.227,68.477 72.227,68.477 83.227,68.477 84.227,67.477 86.227,67.477 87.227,66.477 87.227,59.477 87.227,57.477 91.227,53.477 102.227,53.477 138.227,53.477

## Keep-outs
Keep-Out Layer:
  lines w0.254: 38.227,48.227 ccw(c48.227,48.227) 48.227,38.227 ; 38.227,113.477 cw(c48.227,113.477) 48.227,123.477 ; 128.227,38.227 ccw(c128.227,48.227) 138.227,48.227 ; 128.227,123.477 cw(c128.227,113.477) 138.227,113.477

## Silkscreen, mask and mechanical layers (free items; w line width, h text height)
Top Overlay:
  lines w0.254 net S$10247: 111.727,68.977 111.727,82.977 135.227,82.977 135.227,68.977 111.727,68.977
  lines w0.254 net S$11319: 66.977,45.977 109.727,45.977 109.727,50.477 66.977,50.477 66.977,45.977
  lines w0.254 net S$11323: 97.227,72.727 97.227,82.977 110.727,82.977 110.727,72.727 97.227,72.727
  lines w0.254 net S$12200: 40.227,68.227 40.227,68.477 40.227,80.727 88.977,80.727 89.477,80.727 89.477,68.227 40.227,68.227
  lines w0.254 net S$12225: 40.227,56.227 96.977,56.227 96.977,67.227 61.977,67.227 40.227,67.227 40.227,56.227
  lines w0.254 net S$12289: 98.727,56.227 98.727,67.227 112.227,67.227 112.227,56.227 98.727,56.227
  text "500mA" at 66.316,117.812 h1.5
  text "L" at 54.227,104.477 h2 r180
  text "230V to 5V" at 107.227,102.977 h1.5
  text "N" at 54.227,82.977 h2 r180
  text "Voltage sensor" at 73.451,80.727 h1.5 r358
  text "5V" at 112.727,70.727 h1.5
  text "filter" at 112.727,68.727 h1.5
  text "ZCD" at 91.227,66.977 h1.5
  text "3.3V/1.65V" at 98.766,66.978 h1.5 r3
  text "GND" at 124.727,64.227 h1.5
  text "5V" at 114.227,61.977 h1.5
  text "GND" at 117.477,61.977 h1.5
  text "A0" at 124.477,61.727 h1.5
  text "ZCD" at 124.477,58.977 h1.5
  text "3V3" at 124.477,56.727 h1.5
  text "Valentin C" at 40.227,53.127 h1.5
  text "06/23" at 40.379,50.929 h1.5 r4
  text "ZCD and AC Voltage sensor" at 67.959,46.461 h2.03 r359

## Text inside footprints (layer, text, board x,y; h text height)
U6: Top Overlay "*" at 61.37,77.695 h2.03 r59; Top Overlay "*" at 49.246,77.599 h2.03 r59